# EAGLE board 上部機構用エンコーダ (EAGLE 9.6.2)
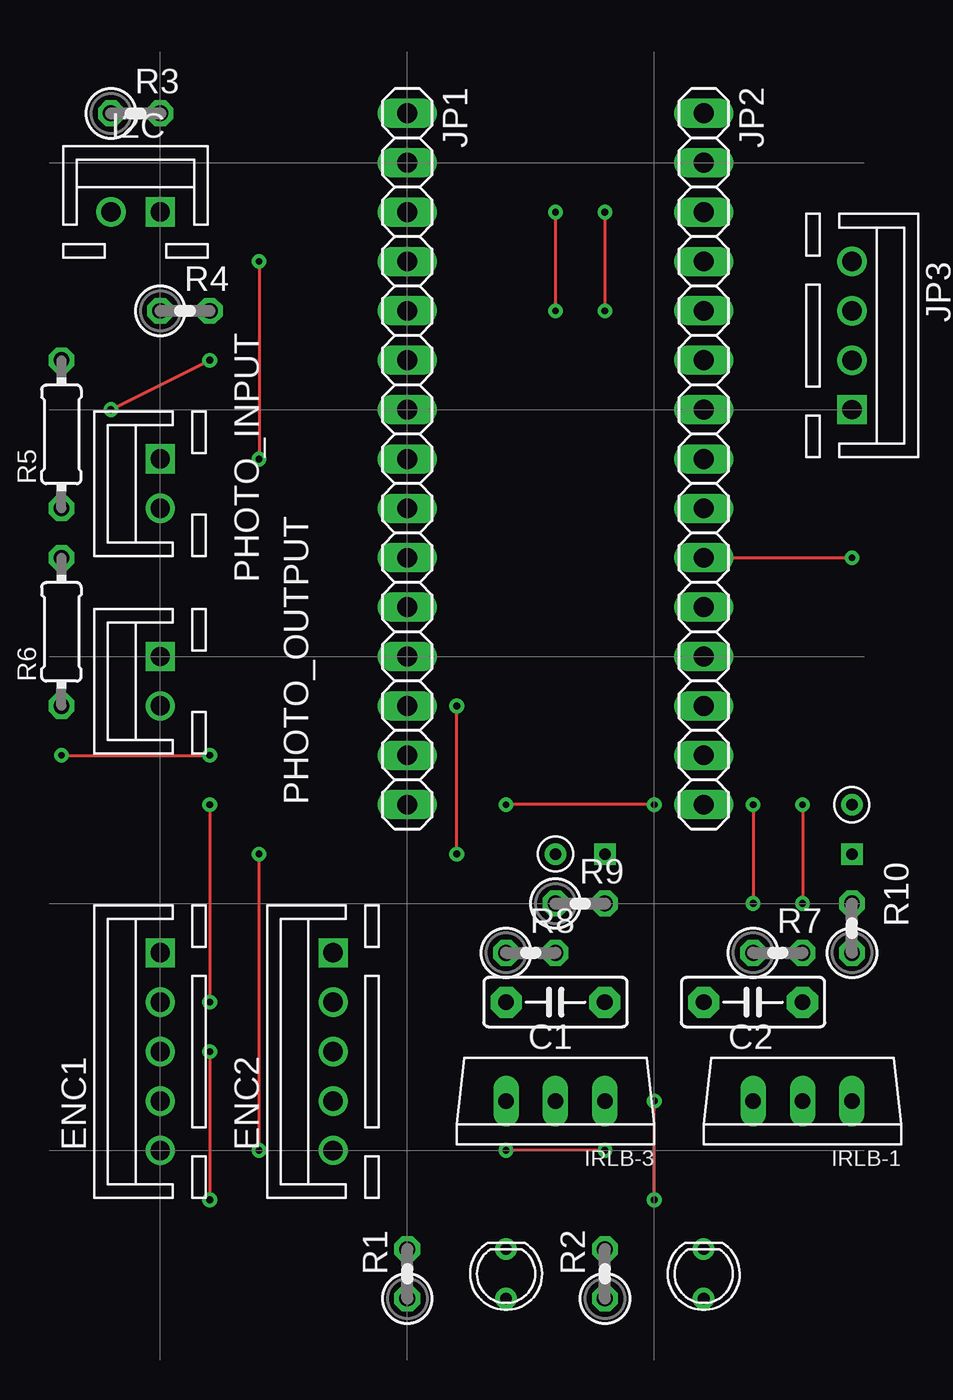
[diagram p0: board, top side]
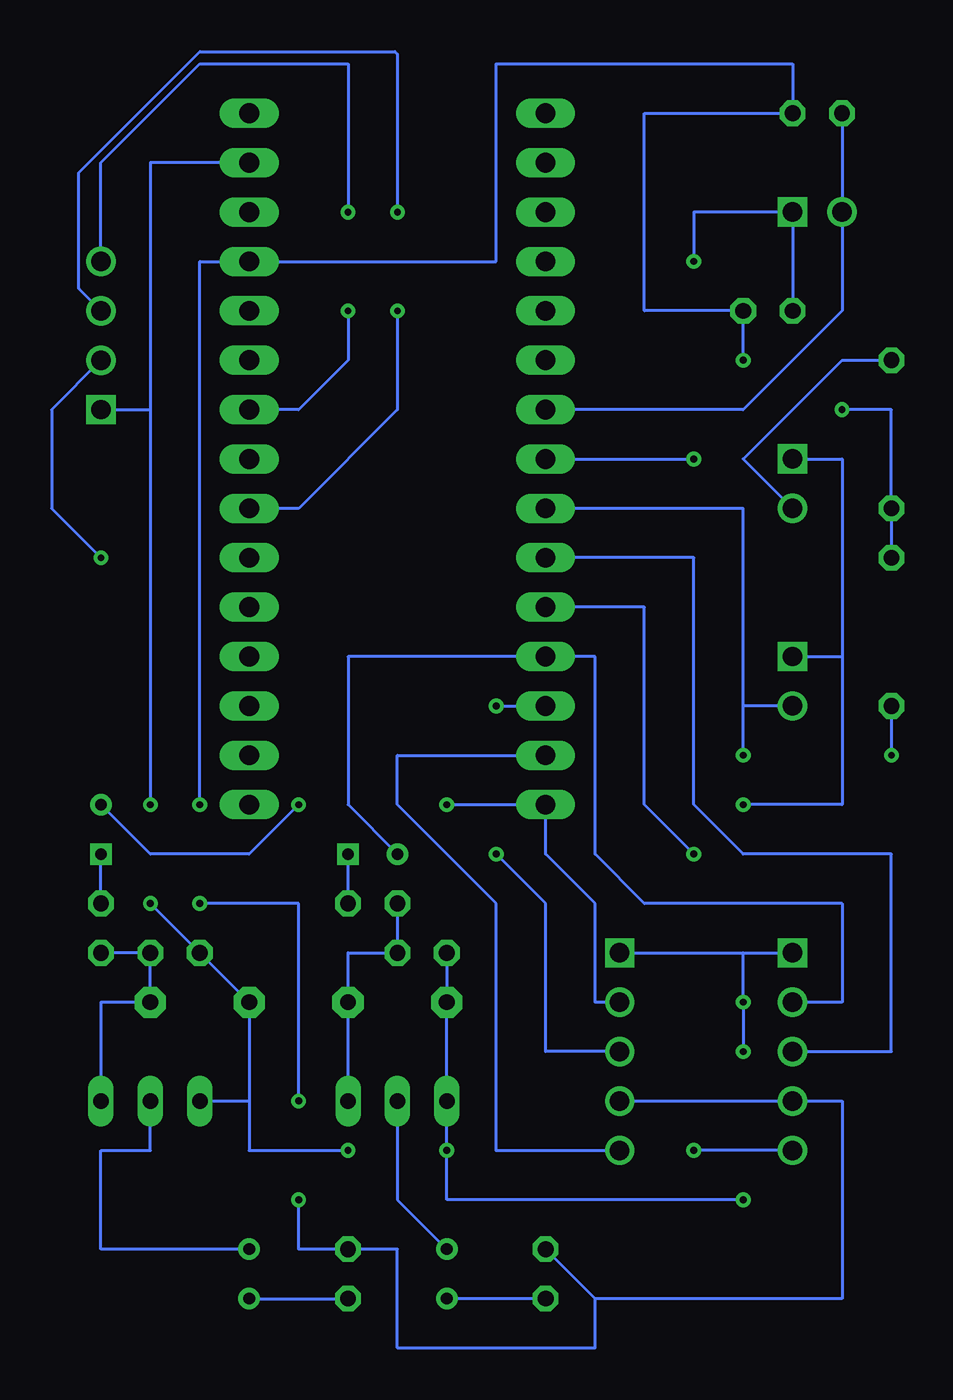
[diagram p1: board, bottom side, seen from below]

No outline drawn. Coordinates in mm, seen from the top.
Copper layers (1*16): Top 0.035mm / dielectric 1.5mm / Bottom 0.035mm
Design rules "default": minimum track width 6mil, minimum drill 0.35mm, track to track 6mil, track to pad 6mil, pad to pad 6mil, via to via 6mil, smd to smd 6mil, copper to edge 40mil, drill to drill 6mil, minimum pad ring 10mil, minimum via ring 8mil, stop-mask expansion 4mil, vias tented up to drill 0mil, thermal gap 10mil

## Footprints (pad centres in the part's own frame; a part is rotated, then mirrored left to right if it is on the bottom)
C5B2.5 = drill 0.813 pad 1.6 octagon: 1 -2.54,0; 2 2.54,0
DIODE_STAND = drill 0.6: A -2.54,0 | drill 0.6 square: C 0,0
B5B-XH = drill 1 square: 1 5.08,0 | drill 1: 2 2.54,0; 3 0,0; 4 -2.54,0; 5 -5.08,0
B2B-XH = drill 1 square: 1 1.27,0 | drill 1: 2 -1.27,0
TO-220AB-STAND = drill 0.8 long: D 0,0; G -2.54,0; S 2.54,0
1X15 = drill 1.016 long: 1 -17.78,0; 2 -15.24,0; 3 -12.7,0; 4 -10.16,0; 5 -7.62,0; 6 -5.08,0; 7 -2.54,0; 8 0,0; 9 2.54,0; 10 5.08,0; 11 7.62,0; 12 10.16,0; 13 12.7,0; 14 15.24,0; 15 17.78,0
B4B-XH = drill 1 square: 1 3.81,0 | drill 1: 2 1.27,0; 3 -1.27,0; 4 -3.81,0
0207/2V = drill 0.813 octagon: 1 -1.27,0; 2 1.27,0
0204/7 = drill 0.813 octagon: 1 -3.81,0; 2 3.81,0
LED3MM = drill 0.6: A 0,0; C 0,2.54

## Placement (x,y rotation side)
C1  [C5B2.5]  27.94,20.32 180 top
C2  [C5B2.5]  38.1,20.32 180 top
D1  DIODE_STAND  [DIODE_STAND]  30.48,27.94 0 top
D2  DIODE_STAND  [DIODE_STAND]  43.18,27.94 270 top
ENC1  [B5B-XH]  7.62,17.78 90 top
ENC2  [B5B-XH]  16.51,17.78 90 top
I2C  02-JST  [B2B-XH]  6.35,60.96 0 top
IRLB-1  IRLB3813STAND  [TO-220AB-STAND]  40.64,15.24 180 top
IRLB-3  IRLB3813STAND  [TO-220AB-STAND]  27.94,15.24 180 top
JP1  [1X15]  20.32,48.26 270 top
JP2  [1X15]  35.56,48.26 270 top
JP3  [B4B-XH]  43.18,54.61 270 top
PHOTO_INPUT  02-JST  [B2B-XH]  7.62,46.99 90 top
PHOTO_OUTPUT  02-JST  [B2B-XH]  7.62,36.83 90 top
R1  330  [0207/2V]  20.32,6.35 90 top
R2  330  [0207/2V]  30.48,6.35 90 top
R3  2.2k  [0207/2V]  6.35,66.04 0 top
R4  2.2k  [0207/2V]  8.89,55.88 0 top
R5  100  [0204/7]  2.54,49.53 90 top
R6  10k  [0204/7]  2.54,39.37 90 top
R7  100k  [0207/2V]  39.37,22.86 0 top
R8  100k  [0207/2V]  26.67,22.86 0 top
R9  10  [0207/2V]  29.21,25.4 0 top
R10  10  [0207/2V]  43.18,24.13 90 top
U$1  [TYPE.C]  45.72,0 90 top
U$2  LED  [LED3MM]  25.4,5.08 0 top
U$3  LED  [LED3MM]  35.56,5.08 0 top

## Library data of the parts
C1 C2 = capacitor-wima
D1 D2 = DIODE_STAND
ENC1 ENC2 I2C JP3 PHOTO_INPUT PHOTO_OUTPUT = con-jst-xh
IRLB-1 IRLB-3 U$2 U$3 = OKUDA_libraries
JP1 JP2 = pinhead
R1-R10 = rcl; SPICEPREFIX: R
U$1 = prototyping-board

## Nets
5V: ENC1.4 ENC2.4 JP2.4 R1.2 R2.2 R3.2 R4.2 R5.1 R6.2
BLUE: JP2.10 JP3.2
ENC1_A: ENC1.3 JP1.10
ENC1_B: ENC1.5 JP1.11
ENC1_X: D1.A ENC1.2 JP1.12
ENC2_A: ENC2.3 JP1.13
ENC2_B: ENC2.5 JP1.14
ENC2_X: D2.A ENC2.2 JP1.15
GND: C1.2 C2.2 ENC1.1 ENC2.1 IRLB-1.S IRLB-3.S JP2.2 JP3.1 PHOTO_INPUT.1 PHOTO_OUTPUT.1 R7.1 R8.1
GREEN: JP2.9 JP3.3
N$1: IRLB-3.D U$2.C
N$2: R1.1 U$2.A
N$3: C1.1 IRLB-3.G R8.2 R9.1
N$4: C2.1 IRLB-1.G R7.2 R10.1
N$5: IRLB-1.D U$3.C
N$6: R2.1 U$3.A
N$7: PHOTO_INPUT.2 R5.2
N$8: D1.C R9.2
N$9: D2.C R10.2
PHOTO_OUT: JP1.9 PHOTO_OUTPUT.2 R6.1
RED: JP2.7 JP3.4
SCL: I2C.1 JP1.8 R4.1
SDA: I2C.2 JP1.7 R3.1

## Tracks (layer width: path | path; a pad name or v marks a point on that pad's centre or on a via)
5V  (via drill 0.35)
  Top 0.152: v5.08,50.8 v10.16,53.34 | v33.02,10.16 v33.02,15.24 | v38.1,30.48 v38.1,25.4
  Bottom 0.152: ENC2.4 ENC1.4 5.08,15.24 5.08,5.08 17.78,5.08 | 17.78,5.08 17.78,2.54 27.94,2.54 27.94,7.62 R2.2 33.02,7.62 v33.02,10.16 | 17.78,5.08 R1.2 | R6.2 R5.1 2.54,50.8 v5.08,50.8 | v10.16,53.34 R4.2 15.24,55.88 15.24,66.04 R3.2 7.62,68.58 22.86,68.58 22.86,58.42 JP2.4 38.1,58.42 v38.1,30.48 | v33.02,15.24 33.02,25.4 v38.1,25.4
BLUE  (via drill 0.35)
  Top 0.152: JP2.10 v43.18,43.18
  Bottom 0.152: JP3.2 45.72,50.8 45.72,45.72 v43.18,43.18
ENC1_A
  Bottom 0.152: ENC1.3 2.54,17.78 2.54,27.94 10.16,27.94 12.7,30.48 12.7,43.18 JP1.10
ENC1_B  (via drill 0.35)
  Top 0.152: v12.7,12.7 v12.7,27.94
  Bottom 0.152: ENC1.5 v12.7,12.7 | JP1.11 15.24,40.64 15.24,30.48 v12.7,27.94
ENC1_X
  Bottom 0.152: ENC1.2 5.08,20.32 5.08,25.4 15.24,25.4 17.78,27.94 17.78,38.1 JP1.12 30.48,38.1 30.48,30.48 D1.A
ENC2_A  (via drill 0.35)
  Top 0.152: v22.86,27.94 v22.86,35.56
  Bottom 0.152: ENC2.3 20.32,17.78 20.32,25.4 v22.86,27.94 | v22.86,35.56 JP1.13
ENC2_B
  Bottom 0.152: ENC2.5 22.86,12.7 22.86,25.4 27.94,30.48 27.94,33.02 JP1.14
ENC2_X  (via drill 0.35)
  Top 0.152: v33.02,30.48 v25.4,30.48
  Bottom 0.152: v33.02,30.48 35.56,27.94 40.64,27.94 D2.A | v25.4,30.48 JP1.15 20.32,27.94 17.78,25.4 17.78,20.32 ENC2.2
GND  (via drill 0.35)
  Top 0.152: v30.48,12.7 v25.4,12.7 | v10.16,30.48 v10.16,20.32 | v40.64,30.48 v40.64,25.4 | v10.16,17.78 v10.16,10.16
  Bottom 0.152: ENC2.1 10.16,22.86 | 10.16,22.86 ENC1.1 | PHOTO_OUTPUT.1 5.08,38.1 | PHOTO_INPUT.1 5.08,48.26 5.08,38.1 | 35.56,15.24 C2.2 R7.1 v40.64,25.4 | IRLB-1.S 35.56,15.24 | 35.56,15.24 35.56,12.7 v30.48,12.7 | 5.08,38.1 5.08,30.48 v10.16,30.48 | 10.16,22.86 v10.16,20.32 v10.16,17.78 | R8.1 C1.2 IRLB-3.S v25.4,12.7 25.4,10.16 v10.16,10.16 | JP2.2 40.64,63.5 40.64,50.8 | 40.64,50.8 v40.64,30.48 | JP3.1 40.64,50.8
GREEN  (via drill 0.35)
  Top 0.152: v27.94,60.96 v27.94,55.88
  Bottom 0.152: JP3.3 44.32,57.02 44.32,62.99 38.1,69.22 28.07,69.22 27.94,69.09 v27.94,60.96 | v27.94,55.88 27.94,50.8 33.02,45.72 JP2.9
N$1
  Bottom 0.152: IRLB-3.D 27.94,10.16 U$2.C
N$2
  Bottom 0.152: R1.1 U$2.A
N$3
  Bottom 0.152: IRLB-3.G C1.1 30.48,22.86 R8.2 R9.1
N$4
  Bottom 0.152: IRLB-1.G 43.18,20.32 C2.1 R7.2 R10.1
N$5
  Bottom 0.152: U$3.C 43.18,7.62 43.18,12.7 40.64,12.7 IRLB-1.D
N$6
  Bottom 0.152: U$3.A R2.1
N$7
  Bottom 0.152: PHOTO_INPUT.2 10.16,48.26 5.08,53.34 R5.2
N$8
  Bottom 0.152: R9.2 D1.C
N$9
  Bottom 0.152: R10.2 D2.C
PHOTO_OUT  (via drill 0.35)
  Top 0.152: v2.54,33.02 v10.16,33.02
  Bottom 0.152: PHOTO_OUTPUT.2 10.16,35.56 | 10.16,35.56 10.16,45.72 JP1.9 | R6.1 v2.54,33.02 | v10.16,33.02 10.16,35.56
RED  (via drill 0.35)
  Top 0.152: v30.48,60.96 v30.48,55.88
  Bottom 0.152: JP3.4 43.18,63.5 38.1,68.58 30.48,68.58 v30.48,60.96 | v30.48,55.88 30.48,53.34 33.02,50.8 JP2.7
SCL  (via drill 0.35)
  Top 0.152: v12.7,58.42 v12.7,48.26
  Bottom 0.152: R4.1 I2C.1 12.7,60.96 v12.7,58.42 | JP1.8 v12.7,48.26
SDA
  Bottom 0.152: R3.1 I2C.2 5.08,55.88 10.16,50.8 JP1.7